# Altium PCB 56PCB原始.pcbdoc (part 3 of 3)
Units mm, origin at the board's own origin, x right, y up, seen from the top; angles counter-clockwise.
Board outline 101.98 x 99.56 mm, 2 copper layers (Top Layer, Bottom Layer); 160 components, 0 nets, 663 pads, 274 vias.
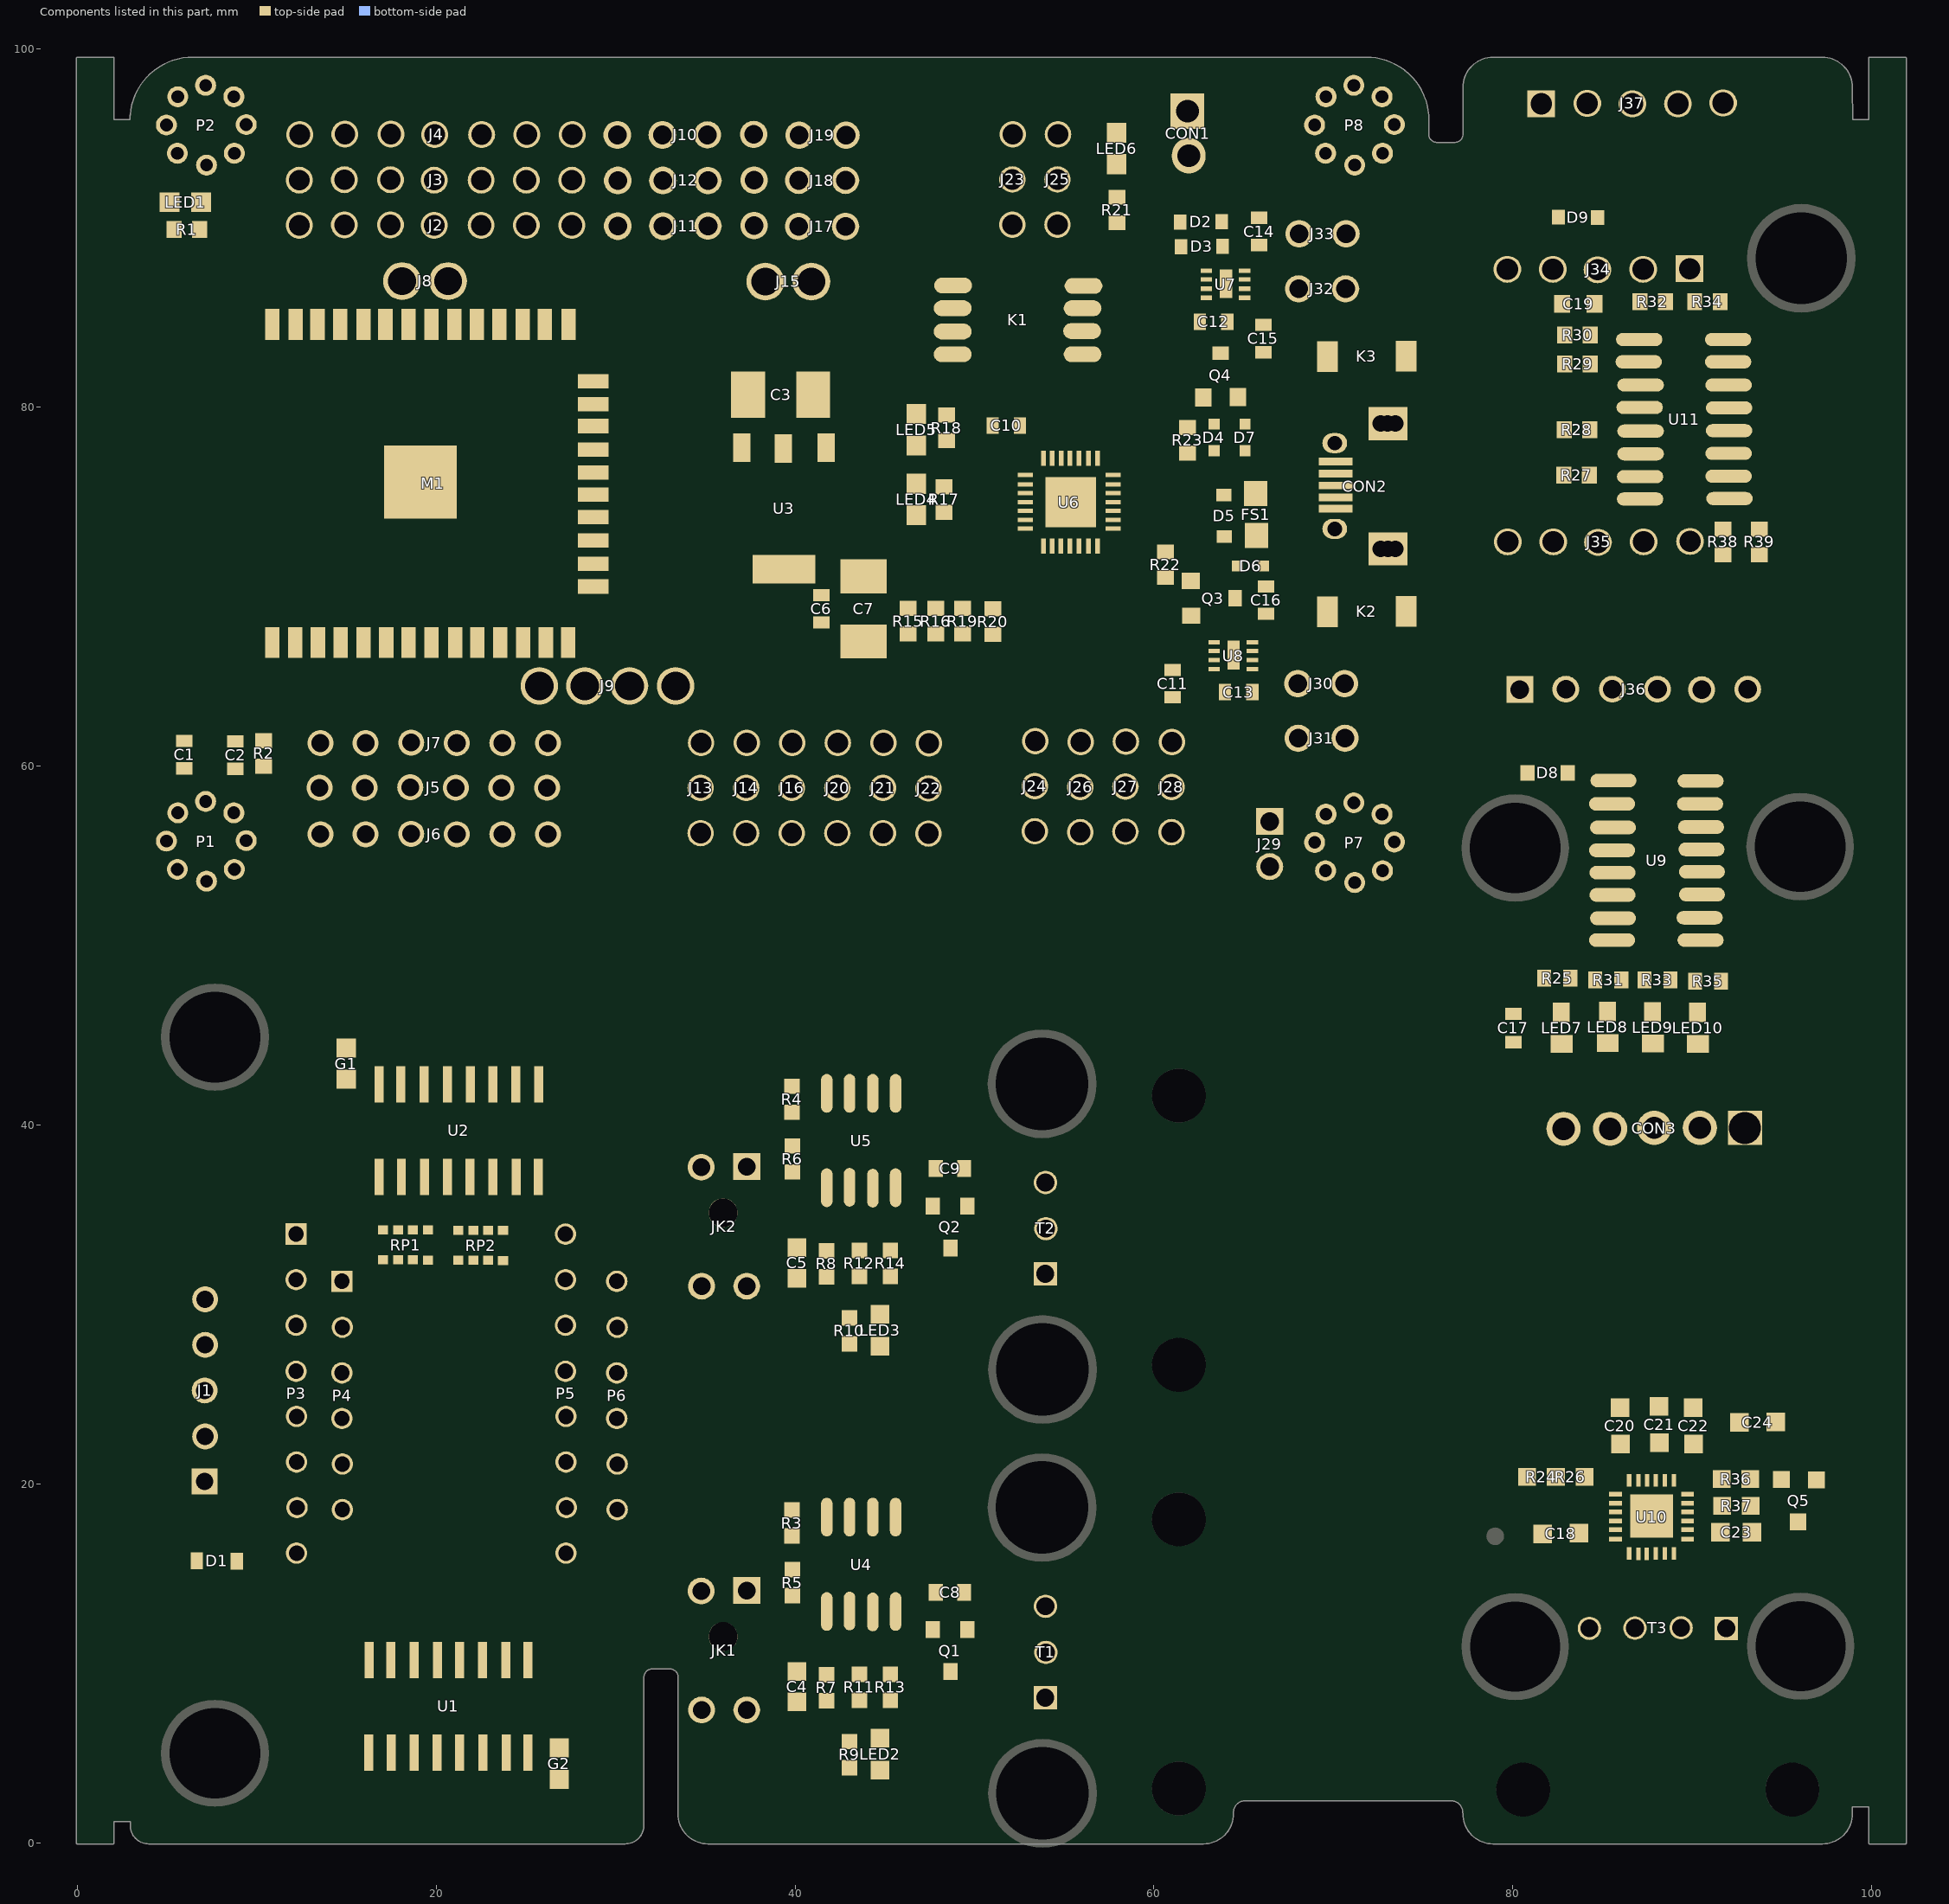
[diagram p3: the components of this part, seen from the top]

## Silkscreen, mask and mechanical layers (free items; w line width, h text height) (continued)
Bottom Overlay:
  circle w0.125: c16.538,12.446 r0.548
  circle w0.125: c16.564,22.428 r0.548
  circle w0.125: c16.589,32.436 r0.548
  circle w0.125: c16.564,42.443 r0.548
  lines w0.176: 15.929,11.176 15.903,11.151 ; 15.954,21.158 15.929,21.133 ; 15.954,41.173 15.929,41.148 ; 15.979,31.166 15.954,31.14 ; 16.132,11.379 16.132,11.405 ; 16.157,21.361 16.157,21.387 ; 16.157,41.377 16.157,41.402 ; 16.183,31.369 16.183,31.394 ; 15.903,11.151 16.868,10.389 16.843,7.468 15.929,6.299 15.903,11.151 ; 15.929,21.133 16.894,20.371 16.868,17.45 15.954,16.281 15.929,21.133 ; 15.929,41.148 16.894,40.386 16.868,37.465 15.954,36.297 15.929,41.148 ; 15.954,31.14 16.919,30.378 16.894,27.457 15.979,26.289 15.954,31.14 ; 16.132,11.405 17.097,10.668 19.637,11.354 20.043,12.344 16.132,11.405 ; 16.157,21.387 17.122,20.65 19.662,21.336 20.069,22.327 16.157,21.387 ; 16.157,41.402 17.122,40.665 19.662,41.351 20.069,42.342 16.157,41.402 ; 16.183,31.394 17.148,30.658 19.688,31.344 20.094,32.334 16.183,31.394 ; 16.106,6.121 20.12,7.112 19.485,7.925 16.945,7.163 16.106,6.121 ; 16.132,16.104 20.145,17.094 19.51,17.907 16.97,17.145 16.132,16.104 ; 16.132,36.119 20.145,37.109 19.51,37.922 16.97,37.16 16.132,36.119 ; 16.157,26.111 20.17,27.102 19.535,27.915 16.995,27.153 16.157,26.111 ; 19.688,8.534 20.221,7.468 20.831,8.687 20.831,11.1 20.272,12.065 19.688,10.897 19.688,8.534 ; 19.713,18.517 20.247,17.45 20.856,18.669 20.856,21.082 20.297,22.047 19.713,20.879 19.713,18.517 ; 19.713,38.532 20.247,37.465 20.856,38.684 20.856,41.097 20.297,42.062 19.713,40.894 19.713,38.532 ; 19.739,28.524 20.272,27.457 20.882,28.677 20.882,31.09 20.323,32.055 19.739,30.886 19.739,28.524 ; 20.424,12.446 20.932,11.633 23.422,12.268 24.336,13.386 20.424,12.446 ; 20.45,22.428 20.958,21.615 23.447,22.25 24.361,23.368 20.45,22.428 ; 20.45,42.443 20.958,41.631 23.447,42.266 24.361,43.383 20.45,42.443 ; 20.475,32.436 20.983,31.623 23.472,32.258 24.387,33.376 20.475,32.436 ; 20.501,7.137 20.932,8.23 23.345,8.89 24.336,8.128 20.501,7.137 ; 20.526,17.12 20.958,18.212 23.371,18.872 24.361,18.11 20.526,17.12 ; 20.526,37.135 20.958,38.227 23.371,38.887 24.361,38.125 20.526,37.135 ; 20.551,27.127 20.983,28.219 23.396,28.88 24.387,28.118 20.551,27.127 ; 23.599,9.068 23.625,12.04 24.59,13.259 24.565,8.382 23.599,9.068 ; 23.625,19.05 23.65,22.022 24.615,23.241 24.59,18.364 23.625,19.05 ; 23.625,39.065 23.65,42.037 24.615,43.256 24.59,38.379 23.625,39.065 ; 23.65,29.058 23.676,32.029 24.641,33.249 24.615,28.372 23.65,29.058
  text "4" at 13.922,38.379 h1.4 r270
  text "C" at 11.56,38.252 h1.4 r270
  text "C" at 11.56,29.769 h1.4 r270
  text "3" at 13.922,29.413 h1.4 r270
  text "B" at 11.509,19.533 h1.4 r270
  text "2" at 14.125,19.507 h1.4 r270
  text "c" at 18.164,14.046 h1.17 r270
  text "dp" at 16.462,13.589 h1.24 r270
  text "b" at 21.567,13.462 h1.17 r270
  text "a" at 24.946,10.541 h1.17 r270
  text "g" at 21.491,9.703 h1.17 r270
  text "A" at 11.458,9.398 h1.47 r270
  text "d" at 17.376,8.865 h1.17 r270
  text "1" at 13.82,8.585 h1.4 r270
  text "f" at 21.771,6.731 h1.17 r270
  text "e" at 18.316,5.69 h1.17 r270

## Text inside footprints (layer, text, board x,y; h text height)
JK1: Top Overlay "E" at 36.775,9.525 h0.99 r270; Top Overlay "C" at 34.261,9.601 h0.99 r270; Top Overlay "K" at 34.185,12.725 h0.99 r270; Top Overlay "A" at 36.801,12.802 h0.99 r270
JK2: Top Overlay "E" at 36.775,33.14 h0.99 r270; Top Overlay "C" at 34.261,33.217 h0.99 r270; Top Overlay "K" at 34.185,36.341 h0.99 r270; Top Overlay "A" at 36.801,36.417 h0.99 r270
K1: Top Overlay "NO" at 54.117,83.039 h0.71 r90; Top Overlay "NO" at 54.168,85.375 h0.71 r90